# Altium PCB Shield.PcbDoc
Units mm, origin at the board's own origin, x right, y up, seen from the top; angles counter-clockwise.
Board outline 59 x 52.7 mm, 2 copper layers (Top Layer, Bottom Layer), stack 1.586 mm thick; 4 components, 1 nets, 6 pads, 0 vias.
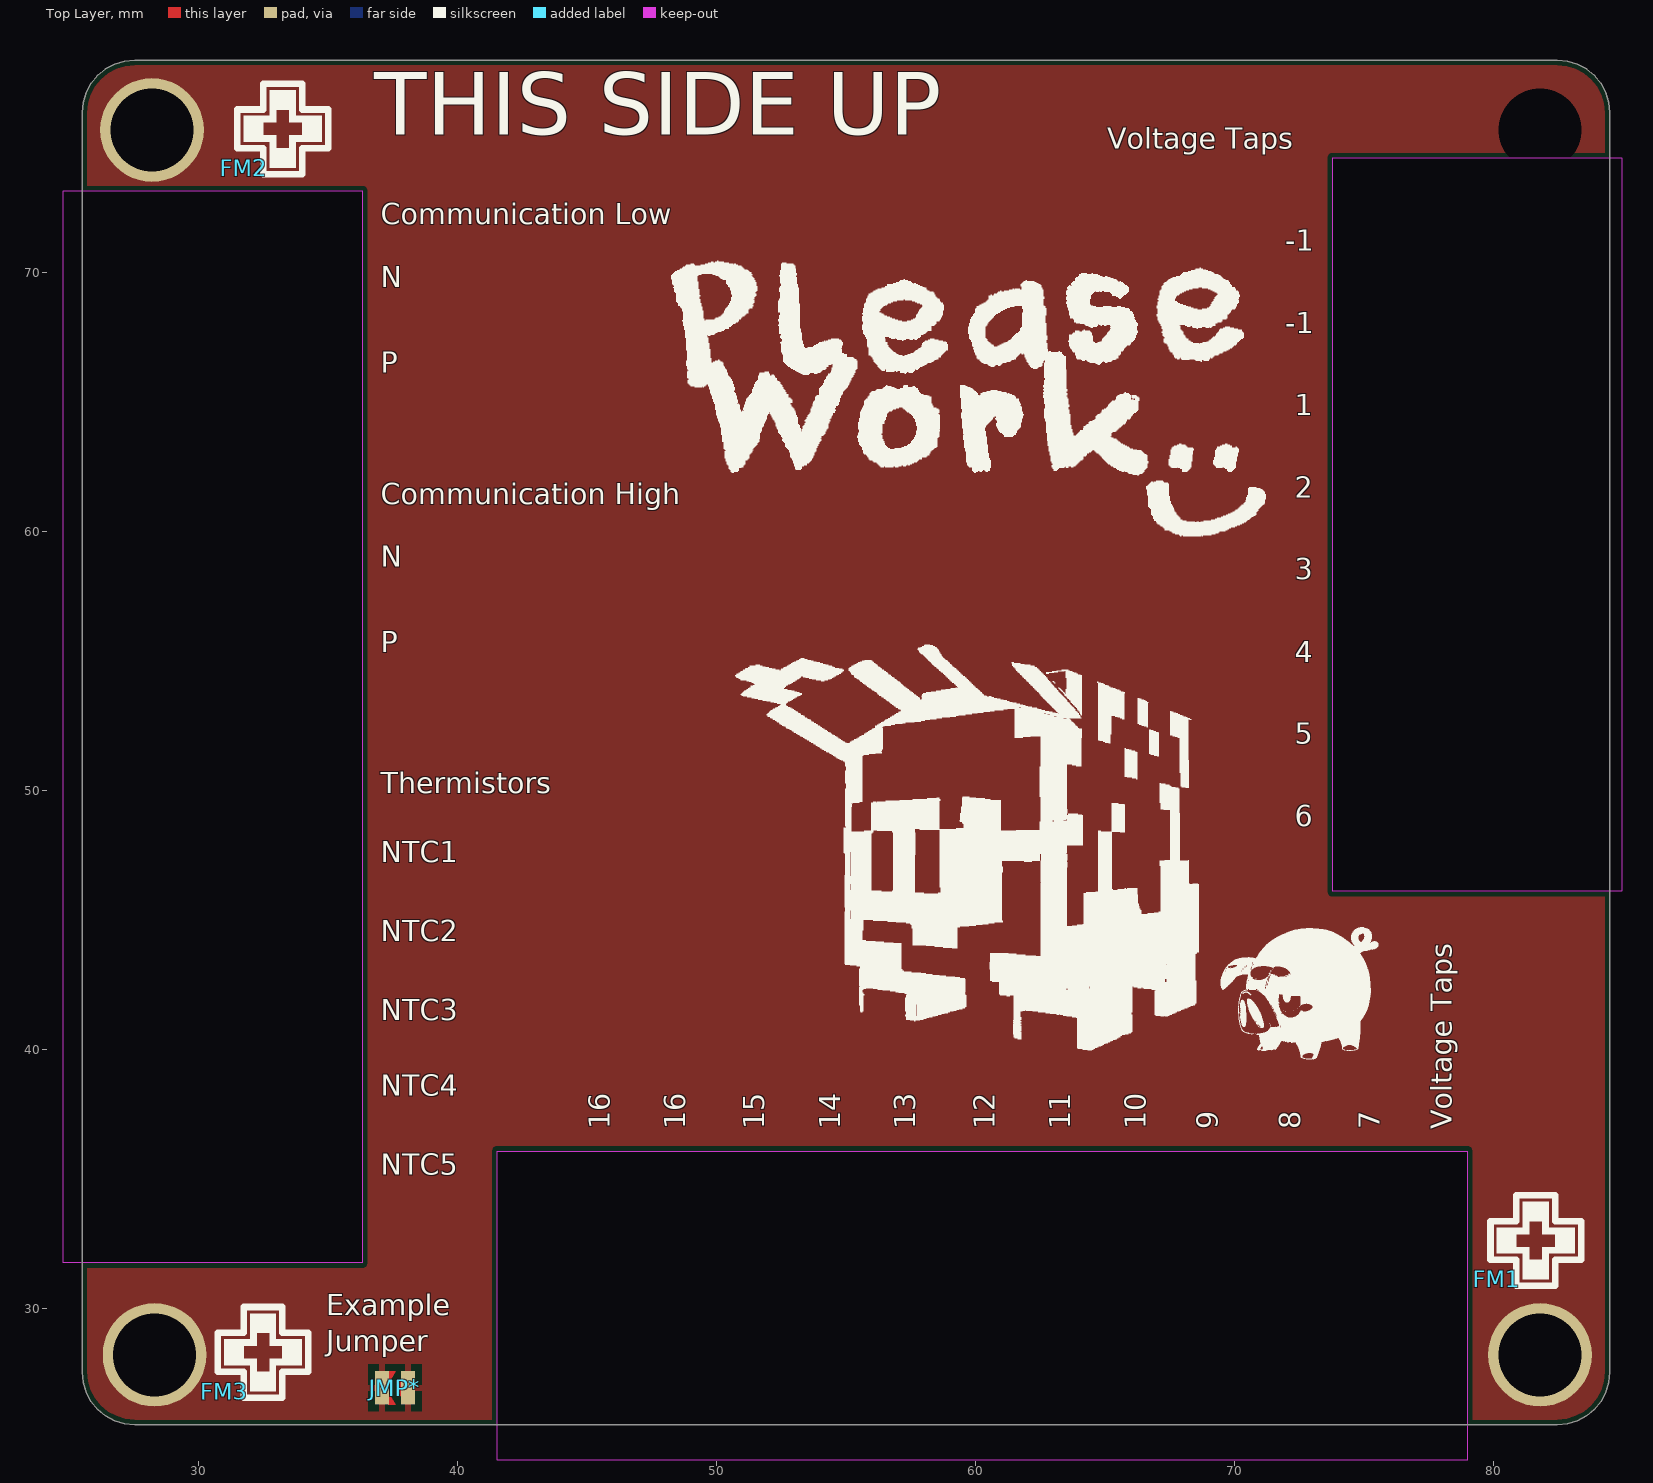
[diagram p0: Top Layer view]
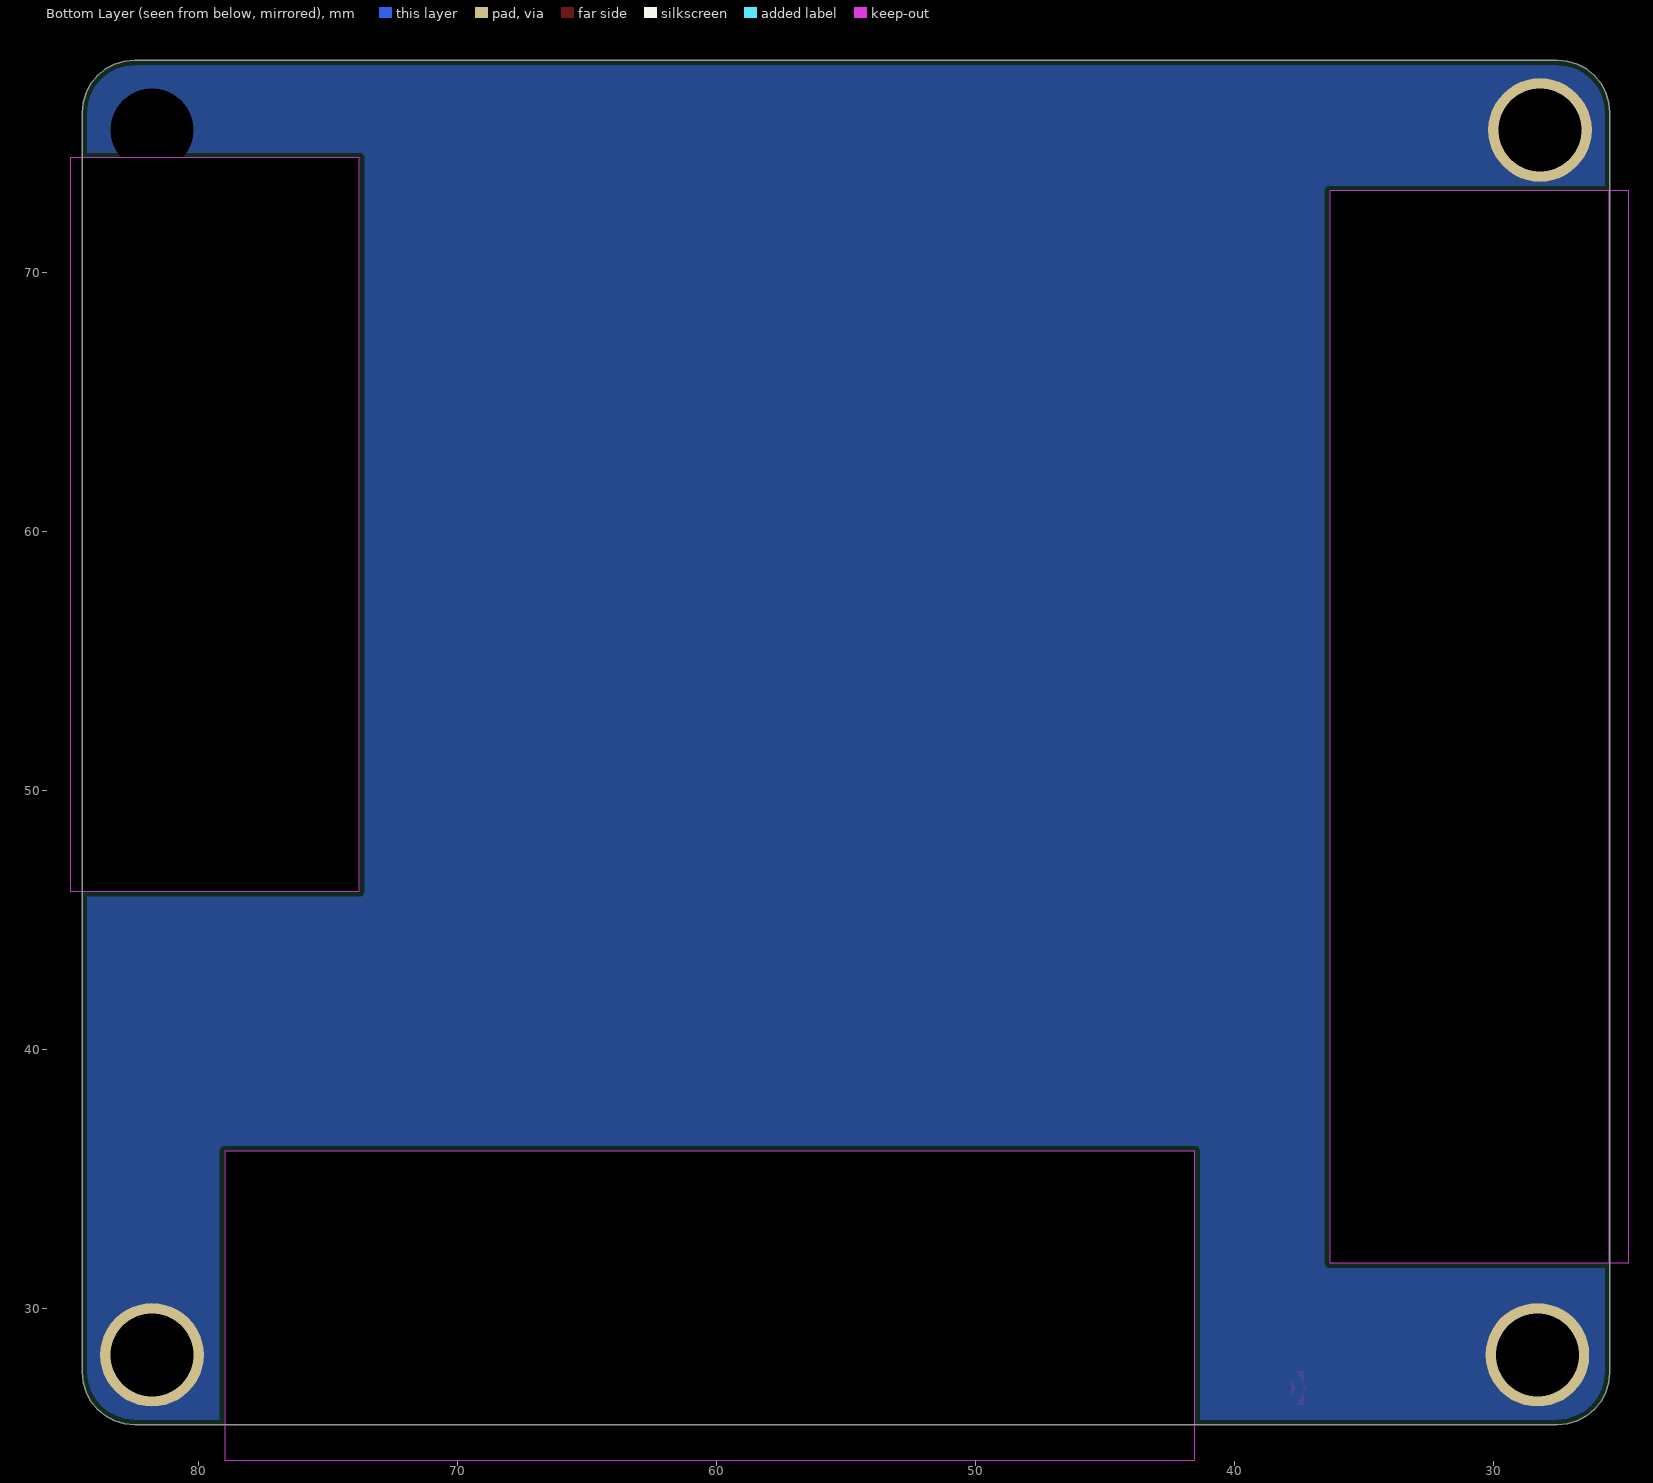
[diagram p1: Bottom Layer view, seen from below]

## Layer stack, top to bottom
Top Solder: solder mask 0.0254, Solder Resist, Dk 3.6
Top Layer: signal copper 0.018
Dielectric 1: dielectric 1.55, FR-4, Dk 4.4
Bottom Layer: signal copper 0.018
Bottom Solder: solder mask 0.0254, Solder Resist, Dk 3.6

## Board outline
25.5,76.168 25.5,27.532 25.539,27.136 25.655,26.754 25.842,26.403 26.095,26.095 26.403,25.842 26.754,25.655 27.136,25.539 27.532,25.5 82.468,25.5 82.864,25.539 83.246,25.655 83.597,25.842 83.905,26.095 84.158,26.403 84.345,26.754 84.461,27.136 84.5,27.532 84.5,76.168 84.461,76.564 84.345,76.946 84.158,77.297 83.905,77.605 83.597,77.858 83.246,78.045 82.864,78.161 82.468,78.2 27.532,78.2 27.136,78.161 26.754,78.045 26.403,77.858 26.095,77.605 25.842,77.297 25.655,76.946 25.539,76.564
cut-out: 73.787,46.101 73.787,74.422 84.963,74.422 84.963,46.101
cut-out: 24.765,31.75 24.765,73.152 36.322,73.152 36.322,31.75
cut-out: 41.529,24.13 41.529,36.068 78.994,36.068 78.994,24.13
cut-out: 25.527,31.75 25.527,73.152 36.322,73.152 36.322,31.75
cut-out: 41.529,24.13 41.529,36.068 78.994,36.068 78.994,24.13

## Design rules (kind name [scope] priority, off if disabled: settings)
BoardOutlineClearance [All] p1: gap=0.2 ignorepadtopadclearanceinfootprint=FALSE
Clearance [All] p1: gap=0.102 ignorepadtopadclearanceinfootprint=FALSE except(0.127: Arc-Via Track-Via SMDPad-Via THPad-Via Via-Via Via-Fill Via-Poly Via-Region Via-Text; 0.25: Arc-Hole Track-Hole SMDPad-Hole THPad-Hole Via-Hole Fill-Hole Poly-Hole Region-Hole Text-Hole)
ComponentClearance [All] p1: gap=0.102 collisioncheckmode=3 verticalgap=0.102 showdistances=TRUE
DiffPairsRouting [InDifferentialPair('CAN')] p1: maxlimit=0.127 minlimit=0.127 mostfreqgap=0.127 toplayer_minwidth=0.278 toplayer_maxwidth=0.278 toplayer_prefwidth=0.278 bottomlayer_minwidth=0.278 bottomlayer_maxwidth=0.278 bottomlayer_prefwidth=0.278 impedanceprofiledriven=TRUE maxuncoupledlength=12.7
DiffPairsRouting DiffPairsRouting_2 [InDifferentialPair('CAN2')] p2: maxlimit=0.127 minlimit=0.127 mostfreqgap=0.127 toplayer_minwidth=0.278 toplayer_maxwidth=0.278 toplayer_prefwidth=0.278 bottomlayer_minwidth=0.278 bottomlayer_maxwidth=0.278 bottomlayer_prefwidth=0.278 impedanceprofiledriven=TRUE maxuncoupledlength=12.7
DiffPairsRouting DiffPairsRouting_1 [InDifferentialPair('USB')] p3: maxlimit=0.227 minlimit=0.227 mostfreqgap=0.227 toplayer_minwidth=0.161 toplayer_maxwidth=0.161 toplayer_prefwidth=0.161 bottomlayer_minwidth=0.161 bottomlayer_maxwidth=0.161 bottomlayer_prefwidth=0.161 impedanceprofiledriven=TRUE maxuncoupledlength=12.7
Height [All] p1: minheight=0 maxheight=1816.048 prefheight=12.7
HoleSize [All] p1: absolutevalues=TRUE maxlimit=6.3 minlimit=0.2 maxpercent=80.000 minpercent=20.000
HoleToHoleClearance [All] p1: gap=0.25 allowstackedmicrovias=FALSE
MinimumAnnularRing [All] p1: minimumring=0.076
MinimumSolderMaskSliver [All] p1: minsoldermaskwidth=0
PlaneClearance [All] p1: clearance=0.102
PlaneConnect PlaneConnectPowerPads [InPadClass('PowerPads')] p1: planeconnectstyle=Direct reliefexpansion=0.508 reliefentries=4 reliefconductorwidth=0.254 reliefairgap=0.254
PlaneConnect [All] p2: pad.planeconnectstyle=Relief pad.reliefexpansion=0.3 pad.reliefentries=4 pad.reliefconductorwidth=0.102 pad.reliefairgap=0.102 via.planeconnectstyle=Direct via.reliefexpansion=0.3 via.reliefentries=4 via.reliefconductorwidth=0.127 via.reliefairgap=0.127
PolygonConnect PolygonConnectSMD [All] p1: thpad.connectstyle=Direct thpad.reliefconductorwidth=0.254 thpad.reliefentries=4 thpad.polygonreliefangle="90 Angle" thpad.airgapwidth=0.254 smdpad.connectstyle=Relief smdpad.reliefconductorwidth=0.254 smdpad.reliefentries=4 smdpad.polygonreliefangle="90 Angle" smdpad.airgapwidth=0.254 via.connectstyle=Direct via.reliefconductorwidth=0.254 via.reliefentries=4 via.polygonreliefangle="90 Angle" via.airgapwidth=0.254
PolygonConnect [All] p2: connectstyle=Direct reliefconductorwidth=0.102 reliefentries=4 polygonreliefangle="90 Angle" airgapwidth=0.102
RoutingTopology [All] p1: topology=Daisy_Balanced
RoutingVias [All] p1: holewidth=0.3 width=0.8 viastyle="Through Hole" minholewidth=0.2 minwidth=0.45 maxholewidth=6.3 maxwidth=6.55
SilkToSilkClearance [All] p1: silktosilkclearance=0
SilkToSolderMaskClearance [IsPad] p1: minsilkscreentomaskgap=0.102 clearancetoexposedcopper=TRUE
SolderMaskExpansion SolderMaskExpansion_1 [IsVia] p1: expansion=0.075 istentingtop=TRUE
SolderMaskExpansion [All] p2: expansion=0.075 istentingtop=FALSE
SupplyNets "Schematic Supply Nets" [InNet('AVSS')] p1: voltage=0.000
Width [All] p1: maxlimit=1816.048 minlimit=0.102 preferedwidth=0.2
19 further rules are at their usual default settings.

## Classes and differential pairs
component class Sheet: FM1 FM3 JMP*

## Components (designator, comment, footprint, x,y, rotation, side; value= is the part's Value field where it differs from the comment)
FM1 "Fiducial Marker" "Fiducial Marker-Footprint-1" 80.137,31.115 r0 top
FM2 "Fiducial Marker" "Fiducial Marker-Footprint-1" 31.75,74.041 r0 top
FM3 "Fiducial Marker" "Fiducial Marker-Footprint-1" 30.988,26.797 r0 top
JMP* "Solder Jumper" "Solder Jumper-Footprint-1" 37.634,26.924 r90 top

## Footprints (in the part's own frame and the unit in brackets; to place one, negate y for a bottom-side part, rotate by r counter-clockwise, add the part's x,y. Pads: shape width x height; smd on the part's side, far side on the other; paste and mask are expansions set on the pad)
"Fiducial Marker-Footprint-1" [mm]
  silkscreen extent -0.25,-0.25 3.25,3.25
"Solder Jumper-Footprint-1" [mm]
  rect 1.3x0.55 smd paste-5.08 mask-5.08: 1(0,-0.45) 2(0,0.55)
  Top Layer region: -0.65,0.022 -0.004,0.401 0.65,0.022 0.65,0.318 -0.65,0.317
  Top Layer region: -0.325,-0.175 0,0 0.325,-0.175

## Part data
FM1 FM2 FM3: library part CMP-00003-4, "fancy style"
JMP*: library part CMP-00000-3, "2 port solder jumper"

## Free pads (board coordinates)
  round 4 hole 3.2: 1(28.2,75.5) 1(28.3,28.2) 1(81.8,28.2)
  round 0 hole 3.2: 1(81.8,75.5)

## Nets (pads, with @x,y where several pads share a name; then routed paths per layer and width w, separated by ;. In a path a pad name is that pad's centre, name@x,y a point inside that pad or via, vN(x,y) a via of type N, cw(c..) or ccw(c..) an arc to the next point about the centre after c; other vN are vias at no path point)
AVSS: JMP*.1 JMP*.2 pad.1

## Polygon pours and split planes (outlines as drawn)
AVSS on Top Layer "NONET_L-01_P-001" (solid, pour order 1): 25.146,78.867 85.979,78.867 87.376,77.47 87.376,27.305 84.709,24.638 26.289,24.638 24.13,26.797
AVSS on Bottom Layer "NONET_L-01_P-001" (solid, pour order 0): 25.146,78.867 85.979,78.867 87.376,77.47 87.376,27.305 84.709,24.638 26.289,24.638 24.13,26.797
no net on Top Solder "NONET_L-01_P-001" (solid): 79.815,75.54 79.815,75.348 ccw(c80.873,75.348) 80.125,74.6 83.5,74.6 ccw(c82.881,75.219) 83.756,75.219 83.756,75.573

## Silkscreen, mask and mechanical layers (free items; w line width, h text height)
Top Overlay:
  drawing of 83 lines, arcs and shapes, not listed
  text "THIS SIDE UP" at 36.776,74.53 h4.16
  text "Voltage Taps" at 65.097,74.503 h1.39
  text "Communication Low" at 37.03,71.589 h1.39
  text "-1" at 71.955,70.558 h1.39
  text "N" at 37.03,69.161 h1.39
  text "-1" at 71.955,67.383 h1.39
  text "P" at 37.03,65.859 h1.39
  text "1" at 72.336,64.208 h1.39
  text "2" at 72.336,61.033 h1.39
  text "Communication High" at 37.03,60.787 h1.39
  text "N" at 37.03,58.366 h1.39
  text "3" at 72.336,57.875 h1.39
  text "P" at 37.03,55.064 h1.39
  text "4" at 72.336,54.683 h1.39
  text "5" at 72.336,51.525 h1.39
  text "Thermistors" at 37.03,49.617 h1.39
  text "6" at 72.336,48.35 h1.39
  text "NTC1" at 37.03,46.951 h1.39
  text "NTC2" at 37.03,43.903 h1.39
  text "NTC3" at 37.03,40.857 h1.39
  text "NTC4" at 37.03,37.934 h1.39
  text "16" at 46.138,36.903 h1.39 r90
  text "16" at 49.059,36.903 h1.39 r90
  text "15" at 52.107,36.903 h1.39 r90
  text "14" at 55.045,36.903 h1.39 r90
  text "13" at 57.949,36.903 h1.39 r90
  text "12" at 61.014,36.903 h1.39 r90
  text "11" at 63.935,36.903 h1.39 r90
  text "10" at 66.839,36.903 h1.39 r90
  text "9" at 69.633,36.903 h1.39 r90
  text "8" at 72.808,36.903 h1.39 r90
  text "7" at 75.873,36.903 h1.39 r90
  text "Voltage Taps" at 78.659,36.903 h1.39 r90
  text "NTC5" at 37.03,34.888 h1.39
  text "Example / Jumper" at 34.925,28.067 h1.39
Top Solder:
  drawing of 19 lines, arcs and shapes, not listed
Drill Drawing:
  drawing of 152 lines, arcs and shapes, not listed